# Altium PCB LCD_KB_CONTROLLER_hv2.PcbDoc (part 2 of 2)
Units mm, origin at the board's own origin, x right, y up, seen from the top; angles counter-clockwise.
Board outline 65 x 95 mm, 2 copper layers (Top Layer, Bottom Layer); 136 components, 106 nets, 445 pads, 363 vias.
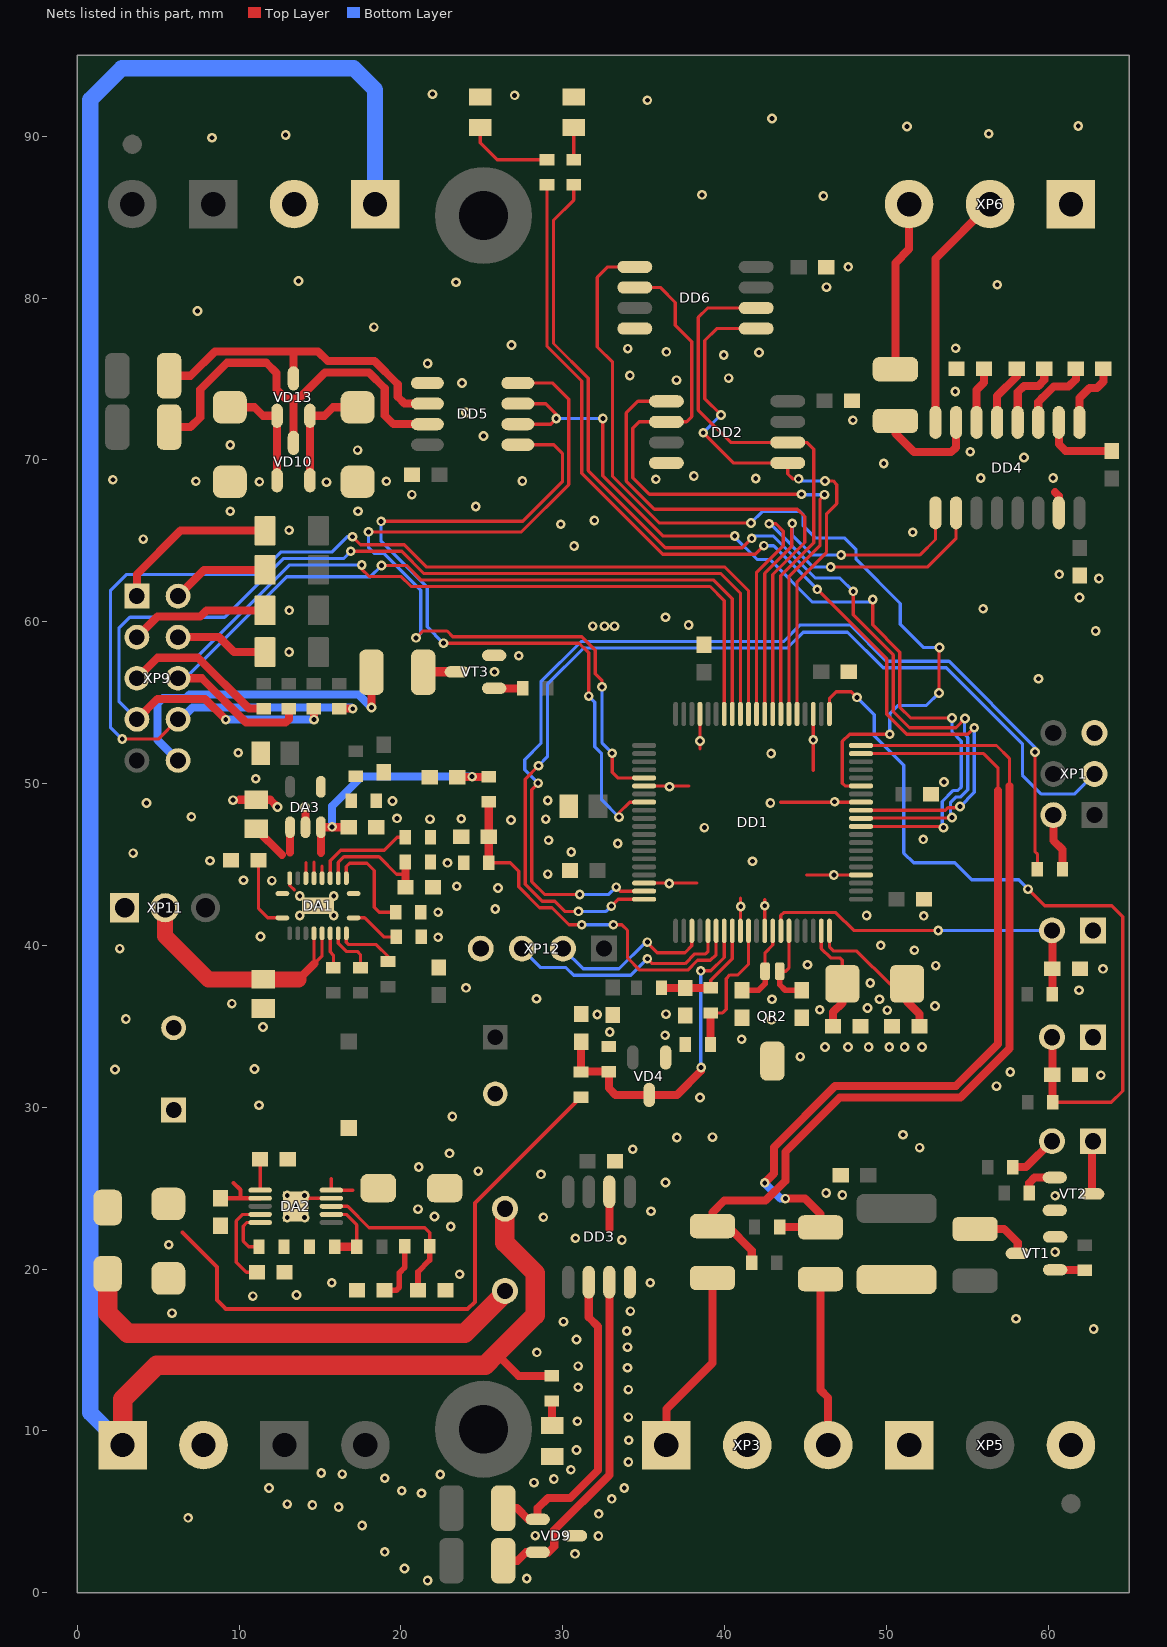
[diagram p2: the nets of this part, all layers, seen from the top]

## Via types
v1: diameter 0.6, hole 0.3, Top Layer to Bottom Layer, tented both sides, 352 vias
v2: diameter 1, hole 0.5, Top Layer to Bottom Layer, tented both sides, 10 vias
v3: diameter 0.6, hole 0.3, Top Layer to Bottom Layer, 1 vias

## Nets (pads, with @x,y where several pads share a name; then routed paths per layer and width w, separated by ;. In a path a pad name is that pad's centre, name@x,y a point inside that pad or via, vN(x,y) a via of type N, cw(c..) or ccw(c..) an arc to the next point about the centre after c; other vN are vias at no path point) (continued)
GND: C1.1 C2.1 C3.1 C4.1 C5.1 C6.1 C7.1 C8.1 C9.1 C10.1 C11.1 C12.1 C13.1 C14.1 C15.2 C17.1 C18.1 C19.2 C20.2 C21.1 C22.1 C23.2 C24.2 C27.1 C29.1 C31.2 C32.2 C33.1 C34.2 C35.2 C36.2 C37.2 C38.2 C39.1 C42.1 C43.2 C44.2 C45.2 DA1.11 DA1.19 DA1.20 DA1.21 DA2.9 DA2.11 DA3.2 DD1.9 DD1.12 DD1.24 DD1.33 DD1.43 DD1.57 DD1.66 DD1.78 DD2.4 DD3.2 DD3.8 DD4.15 DD5.5 DD6.4 J1.1 J2.1 QR2.3 R11.1 R14.1 R18.2 R21.2 R23.2 R24.2 R32.1 R33.1 R36.1 R37.2 VD1.2 VD2.2 VD4.1 VD9.3 VD11.2 VD12.1 VD15.1 VD18.1 VD19.2 VT1.2 VT2.2 VT3.2 XP1.5 XP2.2 XP3.2 XP5.3 XP6.1 XP10.2 XP11.1 XP12.4 | length 34.3
  Top Layer w0.2: DA1.19@13.125,44.15 13.125,43.7 13.4,43.425 ; v1(13.5,23.875) 14,24.375 DA2.9@15.7,24.375 ; DD1.78@35.025,43.85 38.275,43.85 ; DD1.66@35.025,49.85 37.8,49.85 ; 38.475,52.15 DD1.57@38.475,54.3 ; DD1.9@40.975,40.9 40.975,42.925 ; DD1.12@42.475,40.9 42.475,42.825 ; 43.45,48.85 DD1.33@48.425,48.85 ; 45.075,44.35 DD1.24@48.425,44.35 ; 45.475,50.8 DD1.43@45.475,54.3
  Top Layer w0.5: 10.025,49 C42.1@11.05,49 11.925,49 v1(12.375,48.55) ; DA3.2@14.1,47.3 14.1,48.175 ; 32.875,22.475 DD3.2@32.875,24.775 ; 60.417,67.999 60.65,67.766 DD4.15@60.65,66.725
  other v1: 21.65,0.75 27.775,0.875 20.225,1.5 30.75,2.4 19,2.525 32.2,3.5 28.3,3.525 17.6,4.15 6.85,4.625 32.225,4.875 16.15,5.3 14.525,5.425 12.975,5.475 33.025,5.8 21.275,6.15 20.05,6.3 11.85,6.475 33.8,6.475 28.225,6.8 29.45,7.025 19,7.075 22.425,7.3 16.375,7.325 15.075,7.4 30.5,7.6 34.05,8.075 30.85,8.825 34.075,9.425 30.9,10.6 34.05,10.85 34.05,12.55 30.95,12.7 34,13.9 30.95,14 28.4,14.85 34,15.175 30.85,15.65 33.95,16.175 62.8,16.3 30.05,16.75 58,16.925 5.85,17.275 34.175,17.4 10.85,18.325 13.55,18.4 15.725,19.15 35.4,19.15 60.425,21.05 5.65,21.5 33.65,21.8 30.775,21.9 23.075,22.625 12.975,23.175 14.05,23.175 28.8,23.2 22.075,23.25 35.45,23.575 21.05,23.7 60.425,24.525 12.975,24.55 14.05,24.55 47.275,24.575 46.275,24.7 36.35,25.35 28.65,25.85 24.775,26.05 21.1,26.3 23,27.15 34.325,27.4 52.05,27.5 37.05,28.125 39.25,28.15 51.025,28.3 23.175,29.425 11.225,30.125 38.475,30.6 56.8,31.3 63.25,31.975 57.65,32.175 2.325,32.325 10.95,32.365 44.675,33.125 46.2,33.725 47.625,33.725 48.9,33.725 50.175,33.725 51.125,33.725 52.2,33.725 41.05,34.2 36.325,34.45 32.9,34.65 11.475,34.95 42.9,35.4 3,35.45 32.125,35.725 36.375,35.75 50.05,36 45.875,36.025 48.825,36.125 53,36.25 9.55,36.4 42.925,36.675 49.575,36.675 28.375,36.7 61.9,37.225 24.025,37.375 49,37.675 63.375,38.55 53.05,38.75 45.125,38.8 51.725,39.7 2.625,39.8 49.65,40 22.3,40.5 11.325,40.55 52.3,41.825 13.75,41.85 15.85,41.85 48.775,41.85 22.3,42.05 25.825,42.25 41,42.4 14.875,42.45 42.475,42.45 13.75,43.05 15.85,43.05 26,43.55 23.45,43.65 36.575,43.825 12.025,44 10.275,44.025 46.75,44.35 29.075,44.4 22.875,45.1 41.725,45.2 8.2,45.225 3.45,45.7 30.525,45.775 33.4,46.3 29.125,46.5 52.27,46.55 38.75,47.275 26.8,47.75 21.8,47.8 28.95,47.8 23.725,47.825 19.75,47.85 7.05,47.95 14.075,48.55 4.275,48.8 42.825,48.8 46.8,48.875 19.475,48.925 29.075,48.95 9.625,48.975 36.6,49.8 53.55,50.1 11.025,50.3 42.875,51.85 9.95,51.9 38.475,52.625 45.475,52.7 59.4,56.475 25.775,56.9 27.275,57.9 13.093,58.125 62.925,59.425 31.85,59.725 32.575,59.725 33.2,59.725 37.775,59.8 36.35,60.275 13.1,60.7 55.975,60.8 61.925,61.5 63.125,62.675 60.675,62.925 30.7,64.675 4.075,65.1 51.625,65.525 13.093,65.65 29.875,66.025 31.95,66.25 9.45,66.825 17.35,66.825 24.625,67.125 20.675,67.85 15.4,68.625 11.25,68.65 7.325,68.675 19.1,68.675 27.5,68.7 2.2,68.775 35.75,68.799 41.925,68.85 55.825,68.875 60.3,68.875 38.1,68.999 49.834,69.775 58.5,70.15 55.175,70.5 17.325,70.599 9.45,70.925 25.1,71.475 47.925,72.45 24.025,72.925 54.25,74.225 23.775,74.75 37.025,74.925 40.25,75.05 34.145,75.211 21.65,75.95 39.95,76.475 42.125,76.63 36.4,76.675 34.01,76.875 54.275,76.9 26.825,77.1 18.325,78.2 7.425,79.2 46.3,80.675 56.85,80.825 23.4,80.975 13.675,81.05 47.64,81.925 46.1,86.3 38.6,86.375 8.325,89.9 12.875,90.075 56.325,90.15 51.275,90.599 61.85,90.625 42.925,91.1 35.225,92.225 27.025,92.525 21.95,92.599
  other v3: 23.625,19.675
LED_485: DD1.32 R5.1 | length 63.7
  Top Layer w0.2: R5.1@29.025,87 29.025,77.025 31.175,74.875 31.175,69.175 36.175,64.175 41.9,64.175 v1(42.425,64.7) ; v1(45.725,62) 50.025,57.7 50.025,54.284 51.259,53.05 55.025,53.05 v1(55.425,53.45) ; DD1.32@48.425,48.35 53.65,48.35 53.8,48.5 54.475,48.5 v1(54.55,48.575)
  Bottom Layer w0.2: v1(42.425,64.7) 43.025,64.7 v1(45.725,62) ; v1(54.55,48.575) 55.425,49.45 v1(55.425,53.45)
LED_STATE: DD1.31 R4.1 | length 65.4
  Top Layer w0.2: R4.1@30.675,87 30.675,86.05 29.425,84.8 29.425,77.191 31.575,75.041 31.575,69.341 36.341,64.575 41.1,64.575 v1(41.675,65.15) ; v1(47.95,61.875) 47.95,60.425 50.425,57.95 50.425,54.45 51.425,53.45 54.299,53.45 54.85,54.001 v1(54.85,54.025) ; DD1.31@48.425,47.85 48.425,47.875 54.025,47.875 v1(54.05,47.9)
  Bottom Layer w0.2: v1(41.675,65.15) 41.825,65.3 42.991,65.3 45.591,62.7 47.125,62.7 v1(47.95,61.875) ; v1@54.05,48.101 v1(54.05,47.9) 53.95,48 53.95,48.824 54.301,49.175 54.584,49.175 55.025,49.616 55.025,52.85 54.825,53.05 54.825,54 v1(54.85,54.025) v1@54.85,54.001
MISO: DD1.46 DD2.2 DD6.2 | length 44.1
  Top Layer w0.2: DD6.2@34.45,80.655 36.02,80.655 36.95,79.725 36.95,78.326 37.975,77.301 37.975,72.675 37.65,72.35 DD2.2@36.407,72.35 34.725,72.35 34.325,71.95 34.325,68.9 35.35,67.875 v1(44.75,67.875) ; DD1.46@43.975,54.3 43.975,62.787 45.9,64.712 45.9,67.575 v1(46.175,67.85)
  Bottom Layer w0.2: v1(44.75,67.875) 44.775,67.85 v1(46.175,67.85)
MOSI: DD1.45 DD2.5 DD6.5 | length 35.2
  Top Layer w0.2: v1(38.675,71.675) 40.54,69.81 DD2.5@43.9,69.81 43.9,69.125 44.2,68.825 v1(44.575,68.825) ; v1(39.775,72.775) 38.775,73.775 38.775,77.375 39.515,78.115 DD6.5@41.943,78.115 ; DD1.45@44.475,54.3 44.475,62.475 46.3,64.3 46.3,66.675 46.925,67.3 46.925,68.475 46.7,68.7 v1(46.2,68.7)
  Bottom Layer w0.2: v1(38.675,71.675) v1(39.775,72.775) ; v1(44.575,68.825) 44.7,68.7 v1(46.2,68.7)
NetC1_2: C1.2 DD1.19 QR1.1 | length 7
  Top Layer w0.2: DD1.19@45.975,40.9 45.975,39.8 46.55,39.225 47.125,39.225 47.275,39.075 QR1.1@47.275,37.625
  Top Layer w0.5: C1.2@46.7,35 46.7,35.875 47.275,36.45 QR1.1@47.275,37.625
NetC2_2: C2.2 DD1.20 QR1.2 | length 9.7
  Top Layer w0.2: DD1.20@46.475,40.9 46.475,39.925 46.75,39.65 48.175,39.65 50.2,37.625 QR1.2@51.275,37.625
  Top Layer w0.5: QR1.2@51.275,37.625 51.275,36.525 52.05,35.75 C2.2@52.05,34.998
NetC3_2: C3.2 DD1.13 QR2.2 | length 5.1
  Top Layer w0.2: QR2.2@42.5,38.4 42.5,39.55 42.975,40.025 DD1.13@42.975,40.9
  Top Layer w0.35: C3.2@41.075,37.225 42.1,37.225 42.5,37.625 QR2.2@42.5,38.4
NetC4_2: C4.2 DD1.15 QR2.1 | length 5.3
  Top Layer w0.2: QR2.1@43.4,38.4 43.775,38.4 43.975,38.6 DD1.15@43.975,40.9
  Top Layer w0.35: QR2.1@43.4,38.4 43.4,37.575 43.75,37.225 C4.2@44.775,37.225
NetC5_2: C5.2 DD1.14 J1.2 R1.2 | length 22.2
  Top Layer w0.2: DD1.14@43.475,40.9 43.475,41.85 43.65,42.025 46.875,42.025 47.975,40.925 v1(53.2,40.925)
  Top Layer w0.5: J1.2@60.225,40.925 60.25,40.9 R1.2@60.25,36.975
  Bottom Layer w0.2: v1(53.2,40.925) J1.2@60.225,40.925
NetC14_2: C14.2 DD1.8 L1.2 R3.1 | length 7.1
  Top Layer w0.2: R3.1@39.15,37.375 39.15,37.85 40.475,39.175 DD1.8@40.475,40.9
  Top Layer w0.5: L1.2@36.1,37.375 C14.2@37.575,37.375 R3.1@39.15,37.375
NetC19_1: C19.1 DA1.1 | length 4.7
  Top Layer w0.2: C19.1@11.2,45.25 11.2,42.275 11.775,41.7 DA1.1@12.675,41.7
NetC22_2: C22.2 DA1.5 DA1.6 XP11.2 | length 16.5
  Top Layer w0.2: DA1.5@14.625,40.75 14.625,38.9 ; 14.65,38.875 14.625,38.9 ; DA1.6@15.125,40.75 15.125,39.35 14.675,38.9 14.625,38.9
  Top Layer w0.5: 13.675,37.9 14.65,38.875
  Top Layer w1: XP11.2@5.425,42.325 5.425,40.575 8.1,37.9 C22.2@11.5,37.9 13.675,37.9
NetC23_1: C23.1 DA1.13 R24.1 | length 7.3
  Top Layer w0.2: DA1.13@16.125,44.15 16.125,45.125 16.475,45.475 18.65,45.475 19.725,44.4 20.275,44.4
  Top Layer w0.5: C23.1@20.275,43.6 20.275,44.4 R24.1@20.275,45.15
NetC25_1: C25.1 DD4.3 | length 4.8
  Top Layer w0.5: DD4.3@59.38,72.313 59.38,73.58 59.675,73.875 59.69,73.875 60.34,74.525 61.25,74.525 61.7,74.975 C25.1@61.7,75.625
NetC25_2: C25.2 DD4.1 | length 4.2
  Top Layer w0.5: DD4.1@61.92,72.313 61.92,73.82 62.55,74.45 63,74.45 63.4,74.85 C25.2@63.4,75.625
NetC26_2: C26.2 DD4.2 | length 4.8
  Top Layer w0.5: DD4.2@60.65,72.313 60.65,70.975 61.075,70.55 C26.2@63.925,70.55
NetC27_2: C27.2 DD4.6 | length 3.5
  Top Layer w0.5: DD4.6@55.57,72.313 55.57,74.32 56.025,74.775 C27.2@56.025,75.625
NetC28_1: C28.1 DD4.5 | length 3.8
  Top Layer w0.5: DD4.5@56.84,72.313 56.84,73.94 58.05,75.15 C28.1@58.05,75.625
NetC28_2: C28.2 DD4.4 | length 4.5
  Top Layer w0.5: DD4.4@58.11,72.313 58.11,74.185 58.5,74.575 59.4,74.575 59.75,74.925 C28.2@59.75,75.625
NetC30_1: C30.1 DA2.10 L2.1 VD15.2 | length 2.1
  Top Layer w0.2: 15.7,25.6 DA2.10@15.7,24.875 17.032,24.875
NetC30_2: C30.2 DA2.1 | length 1.9
  Top Layer w0.2: DA2.1@11.3,24.875 C30.2@11.3,26.775
NetC35_1: C35.1 DA2.4 | length 5.7
  Top Layer w0.2: C35.1@11.1,19.8 10.45,19.8 9.825,20.425 9.825,22.975 10.225,23.375 DA2.4@11.3,23.375
NetC36_1: C36.1 DA2.8 R31.2 | length 10.6
  Top Layer w0.2: DA2.8@15.7,23.875 16.7,23.875 18.025,22.55 21.475,22.55 21.774,22.251 R31.2@21.774,21.4
  Top Layer w0.35: C36.1@21.05,18.698 21.05,19.825 21.774,20.549 R31.2@21.774,21.4
NetC37_1: C37.1 R31.1 | length 3.7
  Top Layer w0.35: C37.1@18.975,18.7 19.725,18.7 19.9,18.875 19.9,19.775 20.225,20.1 R31.1@20.225,21.4
NetDA1_7: DA1.7 R19.1 | length 2.2
  Top Layer w0.2: DA1.7@15.625,40.75 15.625,39.6 15.825,39.4 R19.1@15.825,38.6
NetDA1_8: DA1.8 R22.1 | length 3.1
  Top Layer w0.2: DA1.8@16.125,40.75 16.125,40.125 16.625,39.625 17.3,39.625 17.5,39.425 R22.1@17.5,38.625
NetDA1_9: DA1.9 R20.1 | length 3.8
  Top Layer w0.2: DA1.9@16.625,40.75 16.625,40.2 16.775,40.05 18.475,40.05 19.2,39.325 R20.1@19.2,39
NetDA1_10: DA1.10 R23.1 | length 3.1
  Top Layer w0.2: DA1.10@17.075,41.7 17.75,41.7 18.925,40.525 R23.1@19.7,40.525
NetDA1_12: DA1.12 R21.1 | length 6.4
  Top Layer w0.2: DA1.12@16.625,44.15 16.625,44.875 16.825,45.075 17.9,45.075 18.35,44.625 18.35,42.35 18.65,42.05 R21.1@19.675,42.05
NetDA1_14: DA1.14 R18.1 | length 6.3
  Top Layer w0.2: DA1.14@15.625,44.15 15.625,45.225 16.275,45.875 18.975,45.875 19.775,46.675 R18.1@20.275,46.675
NetDA2_5: DA2.5 R32.2 | length 3.2
  Top Layer w0.2: R32.2@11.226,21.375 10.6,21.375 10.25,21.725 10.25,22.65 10.475,22.875 DA2.5@11.3,22.875
NetDA2_7: DA2.7 R30.1 R33.2 | length 4.6
  Top Layer w0.2: DA2.7@15.7,23.375 16.625,23.375 17.275,22.725 R30.1@17.275,21.375
  Top Layer w0.5: R33.2@15.899,21.375 R30.1@17.275,21.375
NetDA3_4: DA3.4 R34.1 R36.2
NetDD1_3: DD1.3 XP12.2 | length 10.5
  Top Layer w0.2: v1@35.175,40.2 35.825,39.55 37.55,39.55 37.975,39.975 DD1.3@37.975,40.9
  Bottom Layer w0.2: XP12.2@30.01,39.8 31.26,38.55 33.475,38.55 35.125,40.2 v1@35.175,40.2
  other v1: 35.225,40.2
NetDD1_5: DD1.5 XP12.3 | length 14.3
  Top Layer w0.2: v1(35.225,39.175) 35.525,38.875 37.559,38.875 38.159,39.475 38.825,39.475 38.975,39.625 DD1.5@38.975,40.9
  Bottom Layer w0.2: XP12.3@27.47,39.8 28.645,38.625 30.2,38.625 30.675,38.15 34.2,38.15 v1(35.225,39.175)
NetDD1_10: DD1.10 R3.2 R37.1 | length 8.7
  Top Layer w0.2: R3.2@39.15,35.826 39.876,35.826 40.1,36.05 40.1,37.95 40.325,38.175 40.825,38.175 41.475,38.825 DD1.10@41.475,40.9
  Top Layer w0.5: R37.1@39.125,33.875 39.125,35.801 R3.2@39.15,35.826
NetDD1_35: DD1.35 DD6.1 | length 56.5
  Top Layer w0.2: DD6.1@34.45,81.925 32.775,81.925 32.125,81.275 32.125,76.975 33.075,76.025 33.075,68.972 35.947,66.1 v1(41.625,66.1) ; DD1.35@48.425,49.85 47.45,49.85 47.275,50.025 47.275,52.6 47.725,53.05 v1(50.2,53.05) ; v1(53.25,55.6) 53.25,58.375 v1(53.275,58.4)
  Bottom Layer w0.2: v1(41.625,66.1) 42.35,66.825 44.65,66.825 44.85,66.625 44.85,65.925 45.6,65.175 47.4,65.175 48.125,64.45 48.125,63.85 50.85,61.125 50.85,59.85 52.3,58.4 v1(53.275,58.4) ; v1(50.2,53.05) 50.2,54.3 50.725,54.825 52.475,54.825 v1(53.25,55.6)
NetDD3_6: DD3.6 FU7.1 VD9.1 | length 19.7
  Top Layer w0.5: FU7.1@26.325,5.225 27.175,5.225 27.868,4.532 VD9.1@28.45,4.532 28.45,5.225 29.075,5.85 30.46,5.85 32.175,7.565 32.175,16.45 31.605,17.02 DD3.6@31.605,19.187
NetDD3_7: DD3.7 FU6.1 VD9.2 | length 21.3
  Top Layer w0.5: FU6.1@26.325,1.975 27.2,1.975 27.725,2.5 VD9.2@28.45,2.5 29.125,2.5 29.475,2.85 29.475,3.875 32.875,7.275 DD3.7@32.875,19.187
NetDD5_6: DD5.6 FU10.1 VD13.3 | length 20
  Top Layer w0.5: FU10.1@5.675,75.2 7,75.2 8.5,76.7 13.375,76.7 ; VD13.3@13.359,75.036 13.359,76.684 13.375,76.7 ; DD5.6@21.637,73.475 20.225,73.475 19.8,73.9 19.8,74.675 18.375,76.1 15.475,76.1 14.875,76.7 13.375,76.7
NetDD5_7: DD5.7 FU9.1 VD10.3 | length 25.9
  Top Layer w0.5: FU9.1@5.675,72.025 7,72.025 7.6,72.625 7.6,74.35 9.25,76 11.675,76 12.3,75.375 12.3,74.35 12.85,73.8 13.25,73.8 ; VD10.3@13.334,71.025 VD10.3@13.359,71.05 13.359,73.691 13.25,73.8 ; DD5.7@21.637,72.205 19.545,72.205 19,72.75 19,74.425 18.025,75.4 15.3,75.4 13.7,73.8 13.25,73.8
NetFU1_1: FU1.1 VT1.3 | length 3.7
  Top Layer w0.5: FU1.1@55.475,22.475 57.275,22.475 58.114,21.636 VT1.3@58.114,20.966
NetFU2_1: FU2.1 XP3.1 | length 11.5
  Top Layer w0.5: XP3.1@36.425,9.15 XP3.1@36.4,9.125 36.4,11.35 39.25,14.2 FU2.1@39.25,19.45
NetFU3_1: FU3.1 XP3.3 | length 10.4
  Top Layer w0.5: FU3.1@45.925,19.375 45.925,12.525 46.4,12.05 XP3.3@46.4,9.125
NetFU4_1: FU4.1 XP5.1
NetFU5_1: FU5.1 VT3.3 | length 2.1
  Top Layer w0.6: FU5.1@21.375,56.875 21.4,56.9 VT3.3@23.45,56.9
NetFU5_2: FU5.2 XP9.10 | length 20
  Top Layer w0.5: v1(18.175,54.7) FU5.2@18.175,56.875
  Bottom Layer w0.5: XP9.10@6.225,51.425 4.95,52.7 4.95,54.95 5.293,55.293 6.727,55.293 6.934,55.5 17.375,55.5 v1(18.175,54.7)
NetFU12_2: FU12.2 VD14.1 | length 28.7
  Top Layer w1.2: VD14.1@1.875,19.7 1.875,17.275 3.125,16.025 23.933,16.025 26.425,18.517 FU12.2@26.425,18.645
NetJ3_1: J3.1 VT2.3 | length 3.3
  Top Layer w0.5: VT2.3@62.711,24.641 62.711,27.846 J3.1@62.765,27.9
NetJ3_2: J3.2 R9.1 | length 3.1
  Top Layer w0.5: R9.1@57.8,26.3 58.625,26.3 J3.2@60.225,27.9
NetR4_2: R4.2 VD1.1 | length 2
  Top Layer w0.2: R4.2@30.675,88.549 VD1.1@30.675,90.525
NetR5_2: R5.2 VD2.1 | length 5.5
  Top Layer w0.2: VD2.1@24.9,90.525 24.9,89.6 25.951,88.549 R5.2@29.025,88.549
NetR8_2: R8.2 VT1.1 | length 1.8
  Top Layer w0.5: VT1.1@60.425,19.95 62.226,19.95 R8.2@62.25,19.926
NetR12_2: R12.2 VT2.1 | length 2.3
  Top Layer w0.5: R12.2@58.824,24.7 58.824,25.324 59.157,25.657 VT2.1@60.4,25.657
NetR15_2: R15.2 XP1.2 | length 3.6
  Top Layer w0.5: XP1.2@60.31,48.05 60.31,46.49 60.874,45.926 R15.2@60.874,44.7
NetR25_2: R25.2 VT3.1 | length 1.8
  Top Layer w0.5: VT3.1@25.761,55.884 25.77,55.875 R25.2@27.526,55.875
NetR38_1: R38.1 VD19.1 | length 1.5
  Top Layer w0.5: R38.1@29.325,11.85 29.325,10.35 VD19.1@29.35,10.325
NetVD5_1: VD5.1 XP9.3 | length 8.6
  Top Layer w0.5: XP9.3@3.685,59.045 4.965,60.325 7.6,60.325 7.975,60.7 VD5.1@11.599,60.7
NetVD6_1: VD6.1 XP9.1 | length 10.4
  Top Layer w0.5: XP9.1@3.685,61.585 3.685,62.935 6.375,65.625 VD6.1@11.599,65.625
NetVD7_1: VD7.1 XP9.4 | length 5.8
  Top Layer w0.5: XP9.4@6.225,59.045 8.755,59.045 9.675,58.125 VD7.1@11.599,58.125
NetVD8_1: VD8.1 XP9.2 | length 6
  Top Layer w0.5: XP9.2@6.225,61.585 7.84,63.2 VD8.1@11.599,63.2
NetVD10_1: VD10.1 VD11.1 VD13.1 | length 7.1
  Top Layer w0.5: VD11.1@9.425,73.25 10.95,73.25 11.475,72.725 VD13.1@12.343,72.725 VD10.1@12.343,68.739
NetVD10_2: VD10.2 VD12.2 VD13.2 | length 7.2
  Top Layer w0.5: VD10.2@14.375,68.739 VD13.2@14.375,72.725 15.275,72.725 15.8,73.25 VD12.2@17.325,73.25
ROW1: DD1.54 R29.2 XP9.5 | length 56.9
  Top Layer w0.2: v1(17.575,63.5) 17.575,63.25 18.025,62.8 20,62.8 20.625,62.175 39.1,62.175 39.975,61.3 DD1.54@39.975,54.3
  Top Layer w0.5: XP9.5@3.685,56.505 4.955,57.775 7.45,57.775 10.599,54.626 R29.2@11.525,54.626
  Bottom Layer w0.2: XP9.5@3.685,56.505 5.005,57.825 7.425,57.825 13.1,63.5 v1(17.575,63.5)
ROW2: DD1.53 R28.2 XP9.6 | length 53.8
  Top Layer w0.2: v1(18.8,63.475) 20.359,63.475 21.259,62.575 39.325,62.575 40.475,61.425 DD1.53@40.475,54.3
  Top Layer w0.5: XP9.6@6.225,56.505 7.695,56.505 10.425,53.775 12.875,53.775 13.075,53.975 R28.2@13.075,54.626
  Bottom Layer w0.2: XP9.6@6.225,56.505 6.671,56.505 12.941,62.775 18.1,62.775 v1(18.8,63.475)
ROW3: DD1.52 R27.2 XP9.7 | length 67.7
  Top Layer w0.2: v1(16.9,64.35) 20.05,64.35 21.425,62.975 39.775,62.975 40.975,61.775 DD1.52@40.975,54.3
  Top Layer w0.5: XP9.7@3.685,53.965 4.945,55.225 7.9,55.225 v1(9.175,53.95) ; v1(14.625,53.95) R27.2@14.625,54.626
  Bottom Layer w0.2: XP9.7@3.685,53.965 2.575,55.075 2.575,59.6 3.25,60.275 9.1,60.275 12.725,63.9 16.45,63.9 v1(16.9,64.35)
  Bottom Layer w0.5: v1(9.175,53.95) v1(14.625,53.95)
ROW4: DD1.51 R26.2 XP9.8 | length 75.2
  Top Layer w0.2: v1(2.775,52.75) 5.01,52.75 XP9.8@6.225,53.965 ; v1(17,65.25) 17.5,64.75 20.216,64.75 21.591,63.375 40.025,63.375 41.475,61.925 DD1.51@41.475,54.3
  Top Layer w0.5: R26.2@16.175,54.626 v1(17.026,54.626)
  Bottom Layer w0.2: v1(2.775,52.75) 2.05,53.475 2.05,61.925 3.05,62.925 11.184,62.925 12.559,64.3 15.725,64.3 16.675,65.25 v1(17,65.25)
  Bottom Layer w0.5: XP9.8@6.225,53.965 6.389,53.965 7.124,54.7 16.951,54.7 v1(17.026,54.626)
RS_DIR: DD1.30 DD5.2 DD5.3 | length 55.9
  Top Layer w0.2: DD5.2@27.225,72.205 29.255,72.205 v1(29.6,72.55) 29.6,72.825 28.95,73.475 DD5.3@27.225,73.475 ; v1(32.475,72.55) 32.475,69.006 36.181,65.3 v1(40.625,65.3) ; DD1.30@48.425,47.35 53.624,47.35 53.549,47.275 v1(53.525,47.275) ; v1(49.15,61.375) 49.15,59.8 50.825,58.125 50.825,54.725 51.5,54.05 v1(54.05,54.05)
  Bottom Layer w0.2: v1(29.6,72.55) v1(32.475,72.55) ; v1(40.625,65.3) 40.625,65.225 42,63.85 42.775,63.85 45.4,61.225 49,61.225 v1(49.15,61.375) ; v1@53.525,47.449 v1(53.525,47.275) 53.45,47.35 53.45,48.889 54.136,49.575 54.419,49.575 54.625,49.781 54.625,52.625 54.05,53.2 v1(54.05,54.05)
RS_RXD: DD1.68 DD5.1 | length 48.3
  Top Layer w0.2: v1(18.775,66.2) 27.534,66.2 29.975,68.641 29.975,70.4 29.44,70.935 DD5.1@27.225,70.935 ; v1(22.625,58.675) 31,58.675 31.6,58.075 v1(31.6,55.4) ; v1(33.475,47.925) 33.475,48.2 34.125,48.85 DD1.68@35.025,48.85
  Bottom Layer w0.2: v1(18.775,66.2) 18.775,64.966 21.625,62.116 21.625,59.675 v1(22.625,58.675) ; v1(31.6,55.4) 31.975,55.025 31.975,52.275 32.4,51.85 32.4,49 v1(33.475,47.925)
RS_TXD: DD1.65 DD5.4 | length 52.6
  Top Layer w0.2: v1(18,65.55) 27.45,65.55 30.375,68.475 30.375,73.75 29.38,74.745 DD5.4@27.225,74.745 ; v1(20.925,59) 21.35,59.425 22.85,59.425 23.199,59.076 23.211,59.076 23.212,59.075 31.166,59.075 32,58.241 32,56.775 32.425,56.35 v1(32.425,55.975) ; v1(33.05,51.875) 33.05,50.7 33.4,50.35 DD1.65@35.025,50.35
  Bottom Layer w0.2: v1(18,65.55) 18,64.575 18.35,64.225 18.95,64.225 21.225,61.95 21.225,59.3 v1(20.925,59) ; v1(32.425,55.975) 32.425,52.5 v1(33.05,51.875)
RX232: DD1.49 DD4.9 | length 24.6
  Top Layer w0.2: DD1.49@42.475,54.3 42.475,62.984 44.15,64.659 44.15,66.05 v1(44.175,66.075) ; v1(47.2,64.125) 52.075,64.125 53.03,65.08 DD4.9@53.03,66.725
  Bottom Layer w0.2: v1(44.175,66.075) 44.175,65.35 45.4,64.125 v1(47.2,64.125)
RXD: DD4.8 XP6.2 | length 14.9
  Top Layer w0.5: DD4.8@53.03,72.313 53.03,82.43 XP6.2@56.4,85.8
RXD0: DD1.80 XP1.3 | length 62.2
  Top Layer w0.2: v1(28.5,51.1) 27.675,50.275 27.675,43.778 28.728,42.725 29.5,42.725 30.125,42.1 v1(30.975,42.1) ; v1(33,42.425) 33.425,42.85 DD1.80@35.025,42.85
  Bottom Layer w0.2: v1(28.5,51.1) 29.05,51.65 29.05,56.125 31.3,58.375 43.875,58.375 44.85,59.35 47.591,59.35 49.791,57.15 53.706,57.15 58.4,52.456 58.4,50.525 59.575,49.35 61.61,49.35 XP1.3@62.85,50.59 ; v1(30.975,42.1) 32.675,42.1 v1(33,42.425)
SCK: DD1.47 DD2.6 DD6.6 | length 34.9
  Top Layer w0.2: DD6.6@41.943,79.385 38.96,79.385 38.375,78.8 38.375,73.075 40.37,71.08 DD2.6@43.9,71.08 45.07,71.08 45.5,70.65 45.5,64.878 43.475,62.853 DD1.47@43.475,54.3
SCL: DD1.40 FU2.2 R17.1 | length 55.7
  Top Layer w0.2: DD1.40@48.425,52.35 56.8,52.35 57.6,51.55 57.6,49.85
  Top Layer w0.5: R17.1@41.675,20.4 41.675,21.15 40.175,22.65 FU2.2@39.25,22.65 39.25,23.5 39.975,24.225 42.525,24.225 43.75,25.45 43.75,27.235 47.115,30.6 54.575,30.6 57.6,33.625 57.6,49.85
SDA: DD1.39 FU3.2 R16.1 | length 52.4
  Top Layer w0.2: DD1.39@48.425,51.85 56,51.85 56.9,50.95 56.9,49.56
  Top Layer w0.5: v1(42.475,25.325) 43.05,25.9 43.05,27.525 46.825,31.3 54.285,31.3 56.9,33.915 56.9,49.56 ; R16.1@43.4,22.6 45.9,22.6 FU3.2@45.925,22.575 45.925,23.4 44.974,24.351 v1(43.752,24.351)
  Bottom Layer w0.5: v1(42.475,25.325) 43.449,24.351 v1(43.752,24.351)
SS0: DD1.48 DD2.1 | length 31.9
  Top Layer w0.2: DD2.1@36.407,73.62 34.645,73.62 33.925,72.9 33.925,68.688 35.663,66.95 44.5,66.95 44.95,66.5 44.95,64.894 42.975,62.919 DD1.48@42.975,54.3
TST: C6.2 DD1.41 J2.2 R2.2 | length 48.4
  Top Layer w0.2: DD1.41@46.475,54.3 46.475,55.25 46.9,55.675 47.825,55.675 v1(48.175,55.325) ; v1(58.75,43.475) 59.775,42.45 63.925,42.45 64.6,41.775 64.6,31 63.9,30.3 R2.2@60.274,30.3
  Top Layer w0.5: J2.2@60.225,34.325 60.25,34.3 C6.2@60.25,32 60.25,30.324 R2.2@60.274,30.3
  Bottom Layer w0.2: v1(48.175,55.325) 49.25,54.25 49.25,52.95 51.075,51.125 51.075,45.7 51.675,45.1 54.225,45.1 55.275,44.05 58.175,44.05 v1(58.75,43.475)
TX232: DD1.50 DD4.10 | length 28
  Top Layer w0.2: DD1.50@41.975,54.3 41.975,63.05 43.625,64.7 43.625,65.6 43.175,66.05 v1(42.75,66.05) ; v1(46.55,63.375) 52.525,63.375 54.3,65.15 DD4.10@54.3,66.725
  Bottom Layer w0.2: v1(42.75,66.05) 42.806,66.05 45.481,63.375 v1(46.55,63.375)
TXD: DD4.7 FU8.1 | length 6.7
  Top Layer w0.5: FU8.1@50.55,72.4 50.55,71.625 51.7,70.475 54,70.475 54.3,70.775 DD4.7@54.3,72.313
TXD0: DD1.79 R15.1 | length 63.6
  Top Layer w0.2: v1(28.475,50.025) 28.075,49.625 28.075,43.944 28.868,43.15 v1(31.05,43.15) ; v1(33.3,43.6) 33.55,43.35 DD1.79@35.025,43.35 ; v1(59.175,51.95) 59.175,45.8 59.325,45.65 R15.1@59.325,44.7
  Bottom Layer w0.2: v1(28.475,50.025) 27.65,50.85 27.65,51.475 28.65,52.475 28.65,56.291 31.134,58.775 43.65,58.775 44.675,59.8 47.75,59.8 50,57.55 53.872,57.55 59.175,52.247 v1(59.175,51.95) ; v1(31.05,43.15) 32.85,43.15 v1(33.3,43.6)
TXD_232: FU8.2 XP6.3 | length 10.6
  Top Layer w0.5: FU8.2@50.55,75.6 50.55,82.175 51.4,83.025 XP6.3@51.4,85.8
V_system: C17.2 DD1.6 R10.1 R11.2 | length 24
  Top Layer w0.2: R11.2@25.424,45.375 R11.2@25.424,45.1 26.75,45.1 27.275,44.575 27.275,43.612 28.562,42.325 29.334,42.325 30.384,41.275 v1(31.175,41.275) ; v1(33.125,41.275) 33.65,41.275 34,40.925 34,39.225 34.75,38.475 37.725,38.475 38.325,39.075 39.125,39.075 39.475,39.425 DD1.6@39.475,40.9
  Top Layer w0.5: R11.2@25.424,45.375 C17.2@25.425,46.7 ; C17.2@25.425,46.7 R10.1@25.425,48.875
  Bottom Layer w0.2: v1(31.175,41.275) v1(33.125,41.275)
V_Vin: C18.2 DD1.7 R13.2 R14.2 VD4.3 | length 20.8
  Top Layer w0.2: v1(38.525,38.425) 39.15,38.425 39.975,39.25 DD1.7@39.975,40.9
  Top Layer w0.5: C18.2@31.15,34.05 31.125,34.025 R13.2@31.125,32.174 31.151,32.201 R14.2@32.85,32.201 32.85,31.175 33.261,30.764 VD4.3@35.341,30.764 37.064,30.764 38.55,32.25 v1(38.55,32.45)
  Bottom Layer w0.2: v1(38.525,38.425) 38.525,32.425 v1(38.55,32.45)
VBAT: C21.2 C42.2 C43.1 DA1.15 DA1.16 DA1.17 DA3.1 DA3.3 R10.2 | length 22.3
  Top Layer w0.2: DA1.17@14.125,44.15 14.125,45.1 ; DA1.16@14.625,44.15 14.625,45.15 ; DA1.15@15.125,44.15 15.125,44.9
  Top Layer w0.5: C42.2@11.05,47.2 12.65,45.6 ; 13.15,45.75 DA3.1@13.15,47.3 ; 15.05,45.725 DA3.3@15.05,47.3 C43.1@16.775,47.3 ; C21.2@23.6,50.4 25.401,50.4 R10.2@25.425,50.424
  Bottom Layer w0.5: v1(15.75,47.325) 15.75,48.6 17.575,50.425 v1(24.4,50.425)
VIN: FU12.1 R38.2 XP2.1 XP10.1 | length 151.8
  Top Layer w0.5: 25.913,14.763 27.276,13.399 R38.2@29.325,13.399
  Top Layer w1.2: XP10.1@2.8,9.125 2.8,11.95 4.9,14.05 25.2,14.05 25.913,14.763 28.3,17.15 28.3,19.75 26.425,21.625 FU12.1@26.425,23.725
  Bottom Layer w1: XP10.1@2.8,9.125 0.8,11.125 0.8,92.25 2.75,94.2 17.075,94.2 18.4,92.875 XP2.1@18.4,85.8
VIN_F: C33.2 C34.1 DA2.2 R13.1 VD14.2 VD18.2 | length 40.4
  Top Layer w0.25: 6.5,22.25 8.625,20.125 8.625,18.075 9.175,17.525 24.125,17.525 24.575,17.975 24.575,24.075 R13.1@31.125,30.625 ; C34.1@8.85,24.375 10.075,24.375 ; 9.65,25.325 10.075,24.9 10.075,24.375 ; DA2.2@11.3,24.375 10.075,24.375
pads on no net: DA1.2 DA1.3 DA1.18 DA2.3 DA2.6 DD1.1 DD1.2 DD1.4 DD1.11 DD1.16 DD1.17 DD1.18 DD1.22 DD1.23 DD1.25 DD1.28 DD1.29 DD1.61 DD1.62 DD1.63 DD1.69 DD1.70 DD1.71 DD1.72 DD1.73 DD1.74 DD1.75 DD1.76 DD4.11 DD4.12 DD4.13 DD4.14 REPER1.1 REPER2.1 XP1.1 XP1.4 XP1.6 XP11.3

## Polygon pours and split planes (outlines as drawn)
GND on Top Layer "GND_L01_P044" (hatched Horizontal grid 0.2 track 0.2, remove dead copper, pour order 44): 0,95 65,95 65,0 0,0
+3V3 on Top Layer "+3V3_L01_P040" (hatched Horizontal grid 0.2 track 0.2, remove dead copper, pour order 40): 41.1,83.475 40.325,82.7 40.325,80.375 40.75,79.95 44.325,79.95 45.07,80.695 45.07,82.705 44.3,83.475
+3V3 on Top Layer "+3V3_L01_P036" (hatched Horizontal grid 0.2 track 0.2, remove dead copper, pour order 36): 46.925,74.775 46.2,75.5 43.1,75.5 41.925,74.325 41.925,72.475 42.725,71.675 46.1,71.675 46.925,72.5
+3V3 on Top Layer "+3V3_L01_P038" (hatched Horizontal grid 0.2 track 0.2, remove dead copper, pour order 38): 61,67.5 63.025,69.525 65,69.525 65,64.275 64.4,63.675 61.225,63.675 61,63.9
NetFU4_1 on Top Layer "NETFU4_1_L01_P034" (hatched Horizontal grid 0.2 track 0.2, pour order 34): 53.075,20.725 53.525,20.275 53.525,7.025 52.35,5.85 49.8,5.85 48.725,6.925 48.725,16.625 47.7,17.65 47.7,20.45 47.975,20.725
+3V3 on Top Layer "+3V3_L01_P028" (hatched Horizontal grid 0.2 track 0.2, pour order 28): 23.475,70.9 22.8,71.575 20.25,71.575 19.775,71.1 19.775,70.3 20.225,69.85 21.3,69.85 21.575,69.575 21.575,68.2 21.8,67.975 23.475,67.975
+3V3 on Top Layer "+3V3_L01_P022" (hatched Horizontal grid 0.2 track 0.2, pour order 22): 19.075,53.875 30.75,53.875 33.1,55.675 34.575,55.675 35.246,54.675 35.3,54.025 35.3,53.312 33.263,53.312 32.3,51.825 19.675,51.825 19.475,51.625
+3V3 on Top Layer "+3V3_L01_P020" (hatched Horizontal grid 0.2 track 0.2, pour order 20): 13.875,50.575 14.8,51.5 19.325,51.5 19.8,51.975 19.8,53.125 19.175,53.75 16.6,53.75 16.1,53.25 12.7,53.25 12.2,52.75 12.2,50.375 12.475,50.1 12.475,49.2 13.075,49.2 13.875,49.2
NetDA3_4 on Top Layer "NETDA3_4_L01_P018" (hatched Horizontal grid 0.2 track 0.2, pour order 18): 17.575,49.425 18.075,49.925 18.075,50.875 17.65,51.3 15.725,51.3 15.325,50.9 14.65,50.9 14.425,50.675 14.425,49.2 15.8,49.2 15.95,48.6 16.425,48.125 17.575,48.125
+5V on Top Layer "+5V_L01_P012" (hatched Horizontal grid 0.2 track 0.2, pour order 12): 15.625,32.475 12.775,32.475 12.325,32.925 12.9,35.4 12.9,36.225 19.2,36.225 20.575,36.225 22.8,36.225 24.675,35.85 27.225,35.85 27.225,33 27.225,32.475 26.55,32.475 22.475,32.5 20.425,32.5 19.7,32.5
NetC30_1 on Top Layer "NETC30_1_L01_P006" (hatched Horizontal grid 0.2 track 0.2, pour order 6): 20.275,26.875 21.4,28 21.4,29.925 20.925,30.4 13,30.4 12.175,29.575 12.175,26.025 12.6,25.6 16.275,25.6 16.925,24.95 17.475,24.7 17.475,24 20.275,24
VIN_F on Top Layer "VIN_F_L01_P004" (hatched Horizontal grid 0.2 track 0.2, pour order 4): 0,22.25 6.55,22.25 7.775,23.475 9.3,23.475 9.65,23.825 9.65,29.55 8.075,31.125 3.275,31.125 0,27.85
VBAT on Top Layer "VBAT_L01_P016" (hatched Horizontal grid 0.2 track 0.2, pour order 16): 13.875,44.975 13.775,45.075 12.85,45.075 12.425,45.5 12.425,46 15.3,46 15.35,45.95 15.2,45.8 15.2,44.975
VBAT on Top Layer "VBAT_L01_P014" (hatched Horizontal grid 0.2 track 0.5, pour order 14): 13.85,44.85
no net on Top Layer "NONET_L01_P010" (solid, pour order 10): 16.225,32.475
GND on Bottom Layer "GND_L02_P042" (hatched Horizontal grid 0.2 track 0.2, pour order 42): 0,95 65,95 65,0 0,0
+3V3 on Bottom Layer "+3V3_L02_P026" (hatched Horizontal grid 0.2 track 0.2, pour order 26): 34.75,56.325 38.075,56.325 46.475,56.325 46.9,55.9 46.9,55.325 46.4,54.825 36.25,54.825 34.625,53.2 33.9,53.2 33.375,53.725 33.4,53.75 33.4,54.975 33.925,55.5

## Keep-outs
Keep-Out Layer:
  the board outline again, w0.2

## Other copper
Top Layer:
  pour cut-out: 12.262,32.176 12.313,32.125 20.837,32.125 20.837,30.85 20.911,30.775 20.836,30.7 12.351,30.6
  pour cut-out: 51.762,73.3 49.337,73.3 49.337,74.775 51.762,74.775
  pour cut-out: 3.325,70.838 3.325,73.263 4.8,73.263 4.8,70.838
  pour cut-out: 3.325,73.987 3.325,76.413 4.8,76.413 4.8,73.987
  pour cut-out: 54.288,21.625 56.713,21.625 56.713,20.15 54.288,20.15
  pour cut-out: 44.738,21.725 47.163,21.725 47.163,20.25 44.738,20.25
  pour cut-out: 38.062,21.725 40.488,21.725 40.488,20.25 38.062,20.25

## Silkscreen, mask and mechanical layers (free items; w line width, h text height)
Top Overlay:
  rectangle: 64.225,44.825 64.85,45.45
  lines w0.25: 48.3,77 64.5,77 ; 48.3,94.4 64.5,94.4
  lines w0.254: 0.3,2.825 0.3,0.425 20.9,0.425 20.9,2.825 ; 0.3,15.325 0.3,17.675 20.9,17.675 20.9,15.325 ; 0.3,79.6 0.3,77 20.9,77 20.9,79.6 ; 0.3,92.1 0.3,94.5 20.9,94.5 20.9,92.1 ; 5.4,0.55 5.4,2.85 ; 5.8,92.075 5.8,94.5 ; 10.9,0.525 10.9,2.825 ; 10.9,92.1 10.9,94.4 ; 15.4,0.55 15.4,2.85 ; 15.8,92.075 15.8,94.5 ; 18.425,36.5 18.625,36.3 19.25,36.3 20.075,35.475 20.075,35.425 ; 33.3,2.825 33.3,0.425 64.5,0.425 64.5,2.825 ; 33.3,15.325 33.3,17.925 64.5,17.925 64.5,15.325 ; 39,0.55 39,2.85 ; 44,0.525 44,2.825 ; 48.3,77 48.3,79.6 ; 48.3,92.1 48.3,94.4 ; 48.9,0.525 48.9,2.825 ; 49.5,92.1 49.5,94.4 ; 53.8,92.1 53.8,94.3 ; 54,0.55 54,2.85 ; 58.8,92.075 58.8,94.35 ; 59,0.525 59,2.825 ; 64.5,77 64.5,79.6 ; 64.5,92.1 64.5,94.4
  text "GND" at 15,93.9 h1.2 r180
  text "VIN" at 19.7,93.9 h1.2 r180
  text "TXD" at 53.1,93.9 h1.2 r180
  text "RXD" at 57.8,93.9 h1.2 r180
  text "GND" at 62.9,93.9 h1.2 r180
  text "485B" at 4.9,93.7 h1 r180
  text "485A" at 10.2,93.7 h1 r180
  text "STATE" at 29.45,89.85 h0.8 r90
  text "RS485" at 23.65,89.75 h0.8 r90
  text "RS-485" at 13.7,79.1 h1.5 r180
  text "RS-232" at 61.4,79.1 h1.5 r180
  text "KEYBOARD" at 0.65,67.35 h0.8
  text "RESET" at 59.525,42.7 h0.8
  text "SWD" at 27.6,42.675 h0.8
  text "G" at 24.65,41.45 h0.8
  text "CLK" at 26.525,41.45 h0.8
  text "IO" at 29.375,41.45 h0.8
  text "+3V3" at 31.625,41.45 h0.8
  text "BATTERY" at 3.15,38.05 h0.8
  text "+" at 25.35,36.775 h1.52
  text "TST" at 56.4,33.875 h0.8
  text "BUZZER" at 52.85,27.6 h0.8
  text "+" at 57.8,27.5 h1
  text "-" at 63.375,25.5 h1
  text "DISPLAY" at 44.7,15.9 h1.5
  text "S6 CONNECTOR" at 2.025,15.75 h1.5
  text "POWER" at 27.675,6.375 h0.8
  text "VIN" at 1.1,1 h1.2
  text "GND" at 6.8,1 h1.2
  text "CANH" at 11.3,1 h1
  text "CANL" at 16.4,1 h1
  text "SCL" at 34.5,1 h1.2
  text "GND" at 40,1 h1.2
  text "SDA" at 44.9,1 h1.2
  text "+5V" at 49.6,1 h1.2
  text "BL" at 55.8,1 h1.2
  text "GND" at 60.2,1 h1.2

## Dimensions
25.1,10.1 to 65,0 on Mechanical 2
25.1,10.1 to 0,0 on Mechanical 2
25.1,10.1 to 0,0 on Mechanical 2
25.1,85.1 to 25.1,10.1 on Mechanical 2
65,95 to 65,0 on Mechanical 2
0,95 to 65,95 on Mechanical 2